# Altium PCB PCB2.PcbDoc
Units mil, origin at the board's own origin, x right, y up, seen from the top; angles counter-clockwise.
Board outline 4870 x 2270 mil, 2 copper layers (Top Layer, Bottom Layer); 11 components, 7 nets, 23 pads, 0 vias.
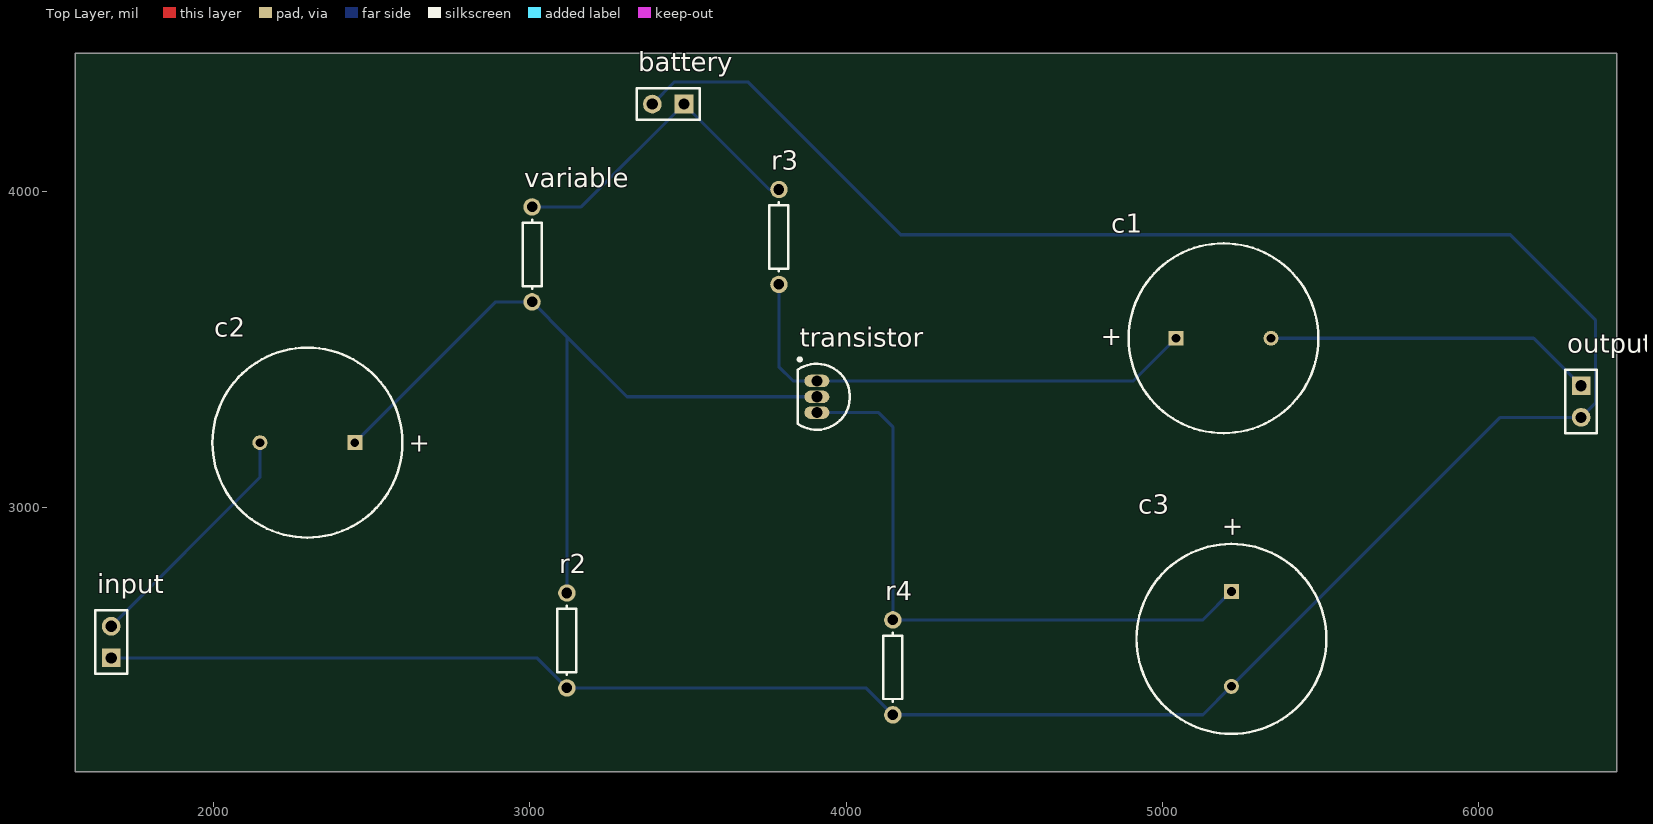
[diagram p0: Top Layer view]
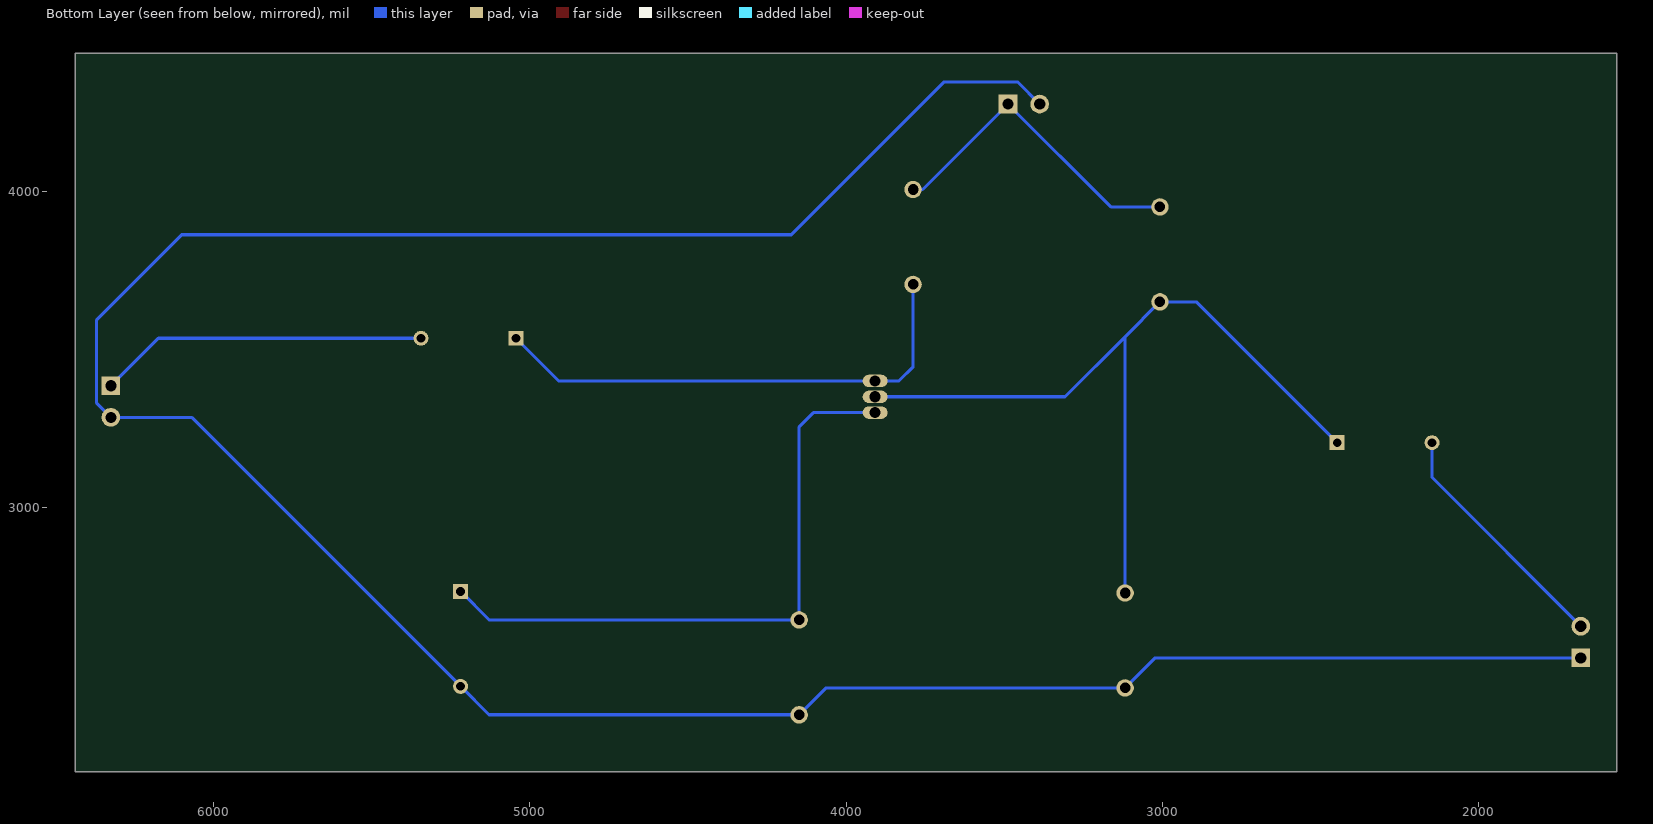
[diagram p1: Bottom Layer view, seen from below]

## Layer stack, top to bottom
Top Solder: solder mask 0.4, Solder Resist, Dk 3.5
Top Layer: signal copper 1.4
Dielectric 1: dielectric 12.6, FR-4, Dk 4.8
Bottom Layer: signal copper 1.4
Bottom Solder: solder mask 0.4, Solder Resist, Dk 3.5

## Board outline
1565,2165 6435,2165 6435,4435 1565,4435

## Design rules (kind name [scope] priority, off if disabled: settings)
Clearance [All] p1: gap=10 ignorepadtopadclearanceinfootprint=FALSE except(0: Arc-Hole Track-Hole SMDPad-Hole THPad-Hole Via-Hole Fill-Hole Poly-Hole Region-Hole Text-Hole)
PolygonConnect [All] p1: connectstyle=Relief reliefconductorwidth=10 reliefentries=4 polygonreliefangle="90 Angle" airgapwidth=10
RoutingLayers [All] p1: top layer_v5=FALSE bottom layer_v5=TRUE
RoutingVias [All] p1: holewidth=28 width=50 viastyle="Through Hole" minholewidth=28 minwidth=50 maxholewidth=28 maxwidth=50
SolderMaskExpansion [All] p1: expansion=4 istentingtop=FALSE
Width [All] p1: maxlimit=10 minlimit=10 preferedwidth=10
29 further rules are at their usual default settings.

## Components (designator, comment, footprint, x,y, rotation, side; value= is the part's Value field where it differs from the comment)
battery "Header 2" HDR1X2 3488,4275 r180 top
c1 "Cap Pol1" RB7.6-15 5193,3535 r180 top value=470
c2 "Cap Pol1" RB7.6-15 2298,3205 r0 top value=100
c3 "Cap Pol1" RB7.6-15 5218,2585 r90 top value=1000
input "Header 2" HDR1X2 1678,2525 r90 top
output "Header 2" HDR1X2 6323,3385 r270 top
r2 "Res1" AXIAL-0.3 3118,2580 r270 top value=470
r3 "Res1" AXIAL-0.3 3788,3855 r270 top value=100
r4 "Res1" AXIAL-0.3 4148,2495 r270 top value=10
transistor "NPN" TO-226-AA 3908,3350 r180 top
variable "Res1" AXIAL-0.3 3008,3800 r270 top value=5k

## Footprints (in the part's own frame and the unit in brackets; to place one, negate y for a bottom-side part, rotate by r counter-clockwise, add the part's x,y. Pads: shape width x height; smd on the part's side, far side on the other; paste and mask are expansions set on the pad)
AXIAL-0.3 [mm] "Axial Device, Thru-Hole; 2 Leads; 0.3 in Pin Spacing"
  round 1.4 hole 0.85: 1(-3.81,0) 2(3.81,0)
  silkscreen extent -2.77,-0.76 2.77,0.76
HDR1X2 [mm] "Connector; Header; 2 Position"
  rect 1.5x1.5 hole 0.9: 1(0,0)
  round 1.5 hole 0.9: 2(2.54,0)
  silkscreen extent -1.27,-1.27 3.81,1.27
RB7.6-15 [mm] "Polarized Capacitor (Radial); 2 Leads"
  rect 1.2x1.2 hole 0.7: 1(3.81,0)
  round 1.2 hole 0.7: 2(-3.81,0)
  silkscreen extent -7.62,-7.62 7.62,7.62
TO-226-AA [mm] "TO, Flat Index; 3 In-Line, Axial Leads; Body Dia. 4.8mm; Leads 0.55 x 0.51 mm (max)"
  oval 2x1 hole 0.9: 1(0,-1.27) 2(0,0) 3(0,1.27)
  silkscreen extent -2.65,-3.13 1.52,2.65, body extent -2.65,-2.66 1.52,2.66, height 5.33

## Part data
battery input output: "Header, 2-Pin", LatestRevisionDate=17-Jul-2002, LatestRevisionNote="Re-released for DXP Platform.", Publisher="Altium Limited"
c1 c2 c3: "Polarized Capacitor (Radial)", LatestRevisionDate=17-Jul-2002, LatestRevisionNote="Re-released for DXP Platform.", PackageDescription="Polarized Capacitor (Radial); 2 Leads", PackageReference=RB7.6-15, Published=8-Jun-2000, Publisher="Altium Limited"
r2 r3 r4 variable: "Resistor", LatestRevisionDate=17-Jul-2002, LatestRevisionNote="Re-released for DXP Platform.", PackageDescription="Axial Device, Thru-Hole; 2 Leads; 0.3 in Pin Spacing", PackageReference=AXIAL-0.3, Published=8-Jun-2000, Publisher="Altium Limited"
transistor: "NPN Bipolar Transistor", Code_JEDEC=TO-226-AA, LatestRevisionDate=17-Jul-2002, LatestRevisionNote="Re-released for DXP Platform.", PackageDescription="TO, Flat Index; 3 In-Line, Axial Leads; Body Dia. 4.8mm; Leads 0.55 x 0.51 mm (max)", PackageReference=TO-226-AA, Published=8-Jun-2000, Publisher="Altium Limited"

## Nets (pads, with @x,y where several pads share a name; then routed paths per layer and width w, separated by ;. In a path a pad name is that pad's centre, name@x,y a point inside that pad or via, vN(x,y) a via of type N, cw(c..) or ccw(c..) an arc to the next point about the centre after c; other vN are vias at no path point)
GND: battery.2 c3.2 input.1 output.2 r2.2 r4.2 | length 8756
  Bottom Layer w10: input.1 3023,2525 r2.2 4063,2430 r4.2 5128,2345 c3.2 6068,3285 output.2 6368,3330 6368,3593 6099,3862 4173,3862 3690,4345 3458,4345 battery.2
Netbattery_1: battery.1 r3.1 variable.1 | length 1026.5
  Bottom Layer w10: variable.1 3163,3950 battery.1 3758,4005 r3.1
Netc1_1: c1.1 r3.2 transistor.1 | length 1589.6
  Bottom Layer w10: r3.2 3788,3445 3833,3400 transistor.1 4908,3400 c1.1
Netc1_2: c1.2 output.1 | length 1042.1
  Bottom Layer w10: c1.2 6173,3535 output.1
Netc2_1: c2.1 r2.1 transistor.2 variable.2 | length 2578.6
  Bottom Layer w10: c2.1 2893,3650 variable.2 3118,3540 ; r2.1 3118,3540 ; transistor.2 3308,3350 3118,3540
Netc2_2: c2.2 input.2 | length 774.7
  Bottom Layer w10: input.2 2148,3095 c2.2
Netc3_1: c3.1 r4.1 transistor.3 | length 1975.9
  Bottom Layer w10: transistor.3 4103,3300 4148,3255 r4.1 5128,2645 c3.1

## Dimensions
1565,2160 to 1565,4445 on Top Layer
1565,4435 to 6435,4435 on Top Layer

## Text inside footprints (layer, text, board x,y; h text height)
c1: Top Overlay "+" at 4872.85,3564.01 h59.06 r180
c2: Top Overlay "+" at 2618.15,3175.99 h59.06
c3: Top Overlay "+" at 5247.01,2905.15 h59.06 r90